# EAGLE board bejing_io_rev_B (EAGLE 5.11)
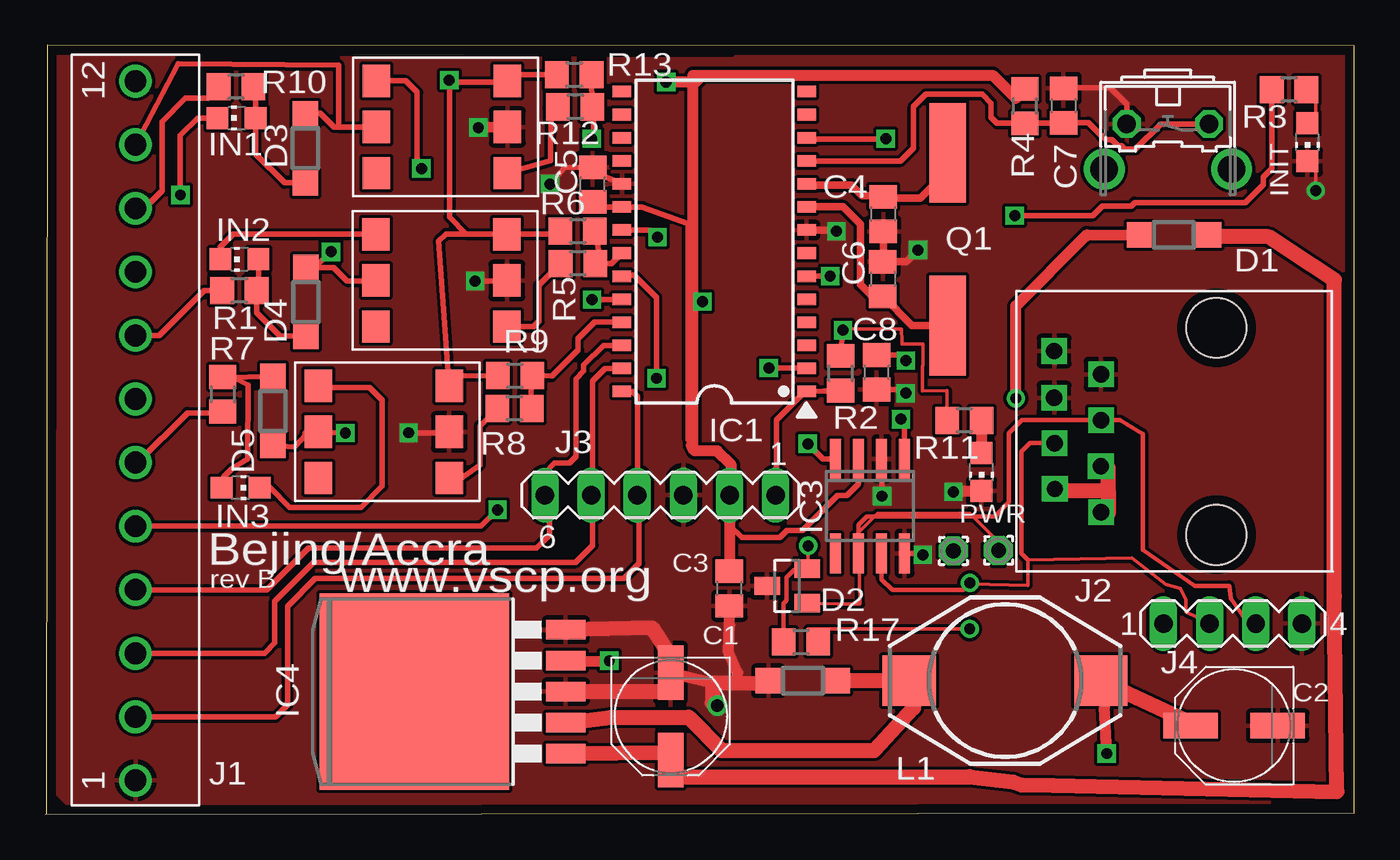
[diagram p0: board, top side]
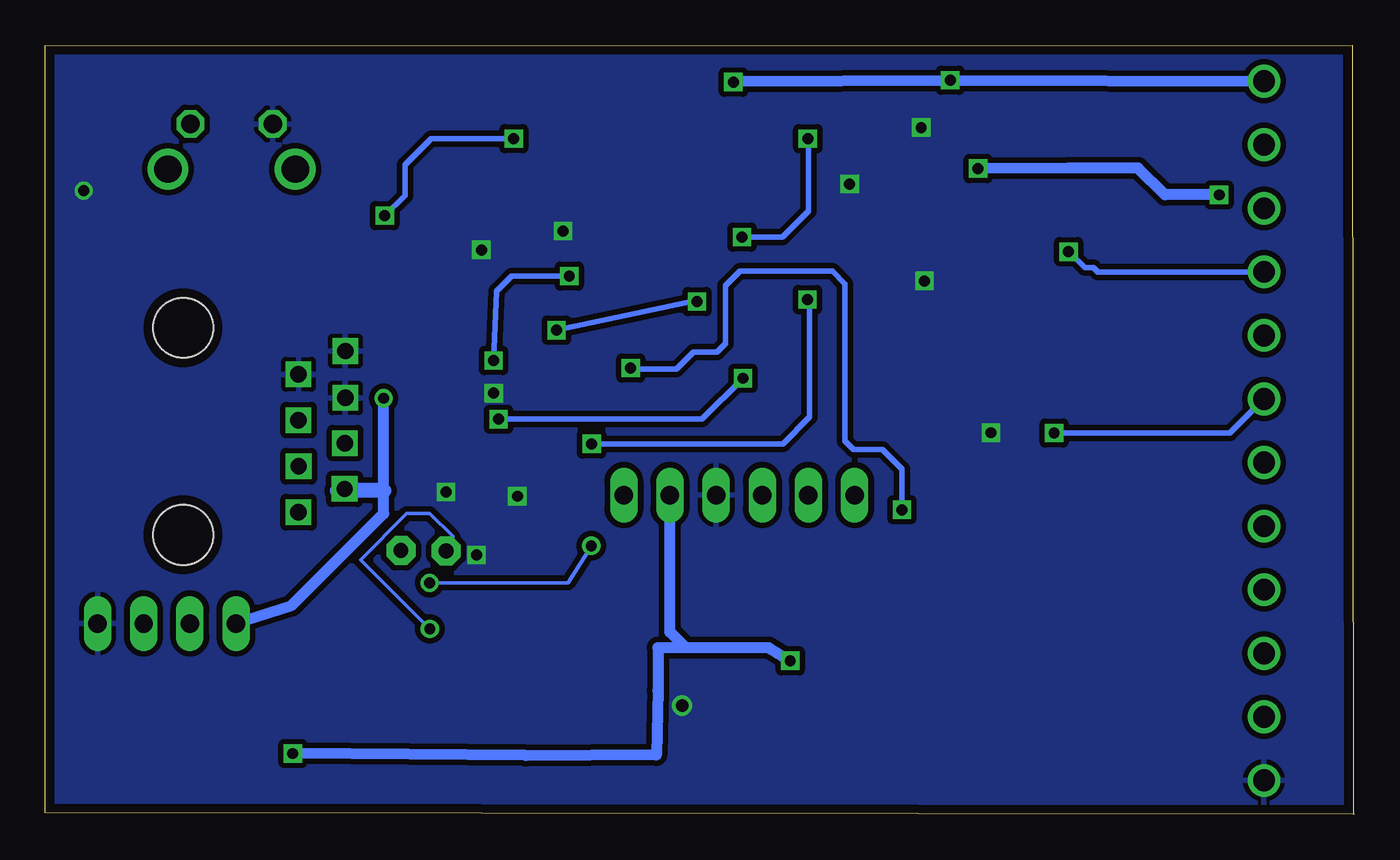
[diagram p1: board, bottom side, seen from below]

Size 72.04 x 42.34 mm. Coordinates in mm from the lower left corner, seen from the top.
Outline: 0,0 72.04,0.09 72.04,42.31 0.09,42.34 0.04,0.01
Copper layers (1*16): Top 0.0356mm / dielectric 1.5011mm / Bottom 0.0356mm
Design rules "SilverCircuits": minimum track width 7mil, minimum drill 14mil, track to track 7mil, track to pad 7mil, pad to pad 7mil, via to via 7mil, smd to smd 0mil, copper to edge 20mil, drill to drill 8mil, minimum pad ring 10mil, minimum via ring 8mil, stop-mask expansion 4mil, vias tented up to drill 0mil, thermal gap 10mil

## Footprints (pad centres in the part's own frame; a part is rotated, then mirrored left to right if it is on the bottom)
SOD123 = smd 1.4 x 1.4: A 1.9,0; C -1.9,0
PANASONIC_D = smd 3 x 1.4: + 2.4,0; - -2.4,0
0805 = smd 1.27 x 1.524: 1 -0.953,0; 2 0.953,0
C0805 = smd 1.3 x 1.5: 1 -0.95,0; 2 0.95,0
SOT23 = smd 1 x 1.4: 1 -0.95,-1.1; 2 0.95,-1.1; 3 0,1.1
SO28 = smd 0.635 x 1.016: 1 -8.255,-5.08; 2 -6.985,-5.08; 3 -5.715,-5.08; 4 -4.445,-5.08; 5 -3.175,-5.08; 6 -1.905,-5.08; 7 -0.635,-5.08; 8 0.635,-5.08; 9 1.905,-5.08; 10 3.175,-5.08; 11 4.445,-5.08; 12 5.715,-5.08; 13 6.985,-5.08; 14 8.255,-5.08; 15 8.255,5.08; 16 6.985,5.08; 17 5.715,5.08; 18 4.445,5.08; 19 3.175,5.08; 20 1.905,5.08; 21 0.635,5.08; 22 -0.635,5.08; 23 -1.905,5.08; 24 -3.175,5.08; 25 -4.445,5.08; 26 -5.715,5.08; 27 -6.985,5.08; 28 -8.255,5.08
H11LX = smd 1.52 x 1.78: 1 0,2.54; 2 0,0; 3 0,-2.54; 4 7.21,-2.54; 5 7.21,0; 6 7.21,2.54
SO-08 = smd 0.6 x 2.2: 1 -1.905,-2.6; 2 -0.635,-2.6; 3 0.635,-2.6; 4 1.905,-2.6; 5 1.905,2.6; 6 0.635,2.6; 7 -0.635,2.6; 8 -1.905,2.6
TO263-5 = smd 1.067 x 2.159: 1 -3.404,-5.791; 2 -1.702,-5.791; 3 0,-5.791; 4 1.702,-5.791; 5 3.404,-5.791 | smd 10.8 x 10.41: 6 0,2.54
PINHEAD-12 = drill 1.2 round: 1 -17.5,0; 2 -14,0; 3 -10.5,0; 4 -7,0; 5 -3.5,0; 6 0,0; 7 3.5,0; 8 7,0; 9 10.5,0; 10 14,0; 11 17.5,0; 12 21,0
RJ-45 = drill 0.9 square: 1 -4.45,6.35; 2 -3.17,8.89; 3 -1.92,6.36; 4 -0.65,8.91; 5 0.62,6.35; 6 1.84,8.93; 7 3.14,6.35; 8 4.42,8.93 | hole 3.3: -5.7,0; 5.7,0
MA06-1 = drill 1.016 long: 1 -6.35,0; 2 -3.81,0; 3 -1.27,0; 4 1.27,0; 5 3.81,0; 6 6.35,0
MA04-1 = drill 1.016 long: 1 -3.81,0; 2 -1.27,0; 3 1.27,0; 4 3.81,0
DO3316P = smd 2.92 x 2.79: 1 -5.28,0; 2 5.28,0
CHIP-LED0805 = smd 1.2 x 1.2: A 0,-1.05; C 0,1.05
1,6/0,8 = drill 0.813 pad 1.6 octagon: 1 0,0
9C = smd 5.5 x 2: P$1 -4.74,0; P$2 4.76,0
R0805 = smd 1.3 x 1.5: 1 -0.95,0; 2 0.95,0
B3F-31XX = drill 1.016 octagon: 1 -2.261,-1.245; 2 2.261,-1.245 | drill 1.499 pad 2.159 round: 3 -3.505,1.245; 4 3.505,1.245

## Placement (x,y rotation side)
1N5819  S1D  [SOD123]  41.69,7.36 180 top
C1  100uF  [PANASONIC_D]  34.42,5.39 270 top
C2  330uF  [PANASONIC_D]  65.44,4.89 180 top
C3  100nF  [0805]  37.65,12.44 90 top
C4  15pF  [C0805]  46.12,33.05 90 top
C5  0.1uF  [C0805]  30.13,34.68 90 top
C6  15pF  [C0805]  46.09,29.48 270 top
C7  0.1uF  [C0805]  56.05,39.02 270 top
C8  1uF  [C0805]  45.76,24.34 90 top
D1  S1D  [SOD123]  62.12,31.91 180 top
D2  NUP2105L  [SOT23]  40.83,12.58 90 top
D3  1N4148  [SOD123]  14.31,36.67 90 top
D4  1N4148  [SOD123]  14.34,28.21 90 top
D5  1N4148  [SOD123]  12.52,22.21 270 top
IC1  PIC18F2580  [SO28]  36.82,31.54 90 top
IC2  H11L1S  [H11LX]  18.19,29.4 0 top
IC3  MCP2551SN  [SO-08]  45.39,16.98 180 top
IC4  LM2575S  [TO263-5]  22.85,6.76 90 top
IC5  H11L1S  [H11LX]  18.22,37.85 0 top
IC6  H11L1S  [H11LX]  15.02,21.06 0 top
J1  OSTTE-12  [PINHEAD-12]  4.96,19.37 90 top
J2  A00-108-220-450  [RJ-45]  64.46,21.09 90 top
J3  [MA06-1]  33.85,17.58 180 top
J4  [MA04-1]  65.36,10.51 0 top
L1  330 uH  [DO3316P]  52.83,7.36 0 top
LED1  green  [CHIP-LED0805]  69.47,37.01 180 top
LED2  [CHIP-LED0805]  10.68,30.57 90 top
LED3  [CHIP-LED0805]  10.75,17.99 270 top
LED8  [CHIP-LED0805]  10.52,38.34 90 top
LED9  red  [CHIP-LED0805]  51.53,18.85 180 top
PAD1  [1,6/0,8]  49.98,14.5 0 top
PAD2  [1,6/0,8]  52.47,14.53 0 top
Q1  10 MHz  [9C]  49.66,31.68 270 top
R1  330  [R0805]  10.68,28.84 180 top
R2  10K  [R0805]  43.78,24.29 90 top
R3  1K  [R0805]  68.46,39.9 180 top
R4  10K  [R0805]  53.92,39 90 top
R5  330  [R0805]  29.31,30.33 180 top
R6  10K  [R0805]  29.3,32.12 0 top
R7  330  [R0805]  9.76,23.13 270 top
R8  330  [R0805]  25.82,22.35 180 top
R9  10K  [R0805]  25.85,24.16 0 top
R10  330  [R0805]  10.49,40.06 180 top
R11  1K  [R0805]  50.59,21.69 180 top
R12  330  [R0805]  29.16,38.95 180 top
R13  10K  [R0805]  29.11,40.73 0 top
R17  120  [R0805]  41.59,9.5 0 top
S1  [B3F-31XX]  61.79,36.77 180 top

## Library data of the parts
1N5819 D1-D5 = diode
C1 C2 C4-C8 R1-R13 R17 = rcl
C3 = cap-master
IC1 = pic_olin
IC2 IC5 IC6 J1 J2 Q1 = vscpcan
IC3 = microchip_can
IC4 = v-reg-3
J3 J4 = con-lstb; OC_FARNELL: unknown; OC_NEWARK: unknown
L1 = inductor-coilcraft; OC_FARNELL: unknown; OC_NEWARK: unknown
LED1-LED3 LED8 LED9 = led
PAD1 PAD2 = wirepad
S1 = switch-omron; MPN: B3F-3100; OC_FARNELL: 959704; OC_NEWARK: 36M3582

## Nets
+12V: D1.A J2.1 J2.2 J2.3 J4.1
CANL: D2.2 IC3.7 J2.4 J4.2 R17.1
CANL1: D2.1 IC3.6 J2.5 J4.3 PAD2.1
GND: 1N5819.A C1.- C2.- C3.1 C4.1 C5.2 C6.1 C7.1 C8.1 D2.3 IC1.8 IC1.19 IC2.5 IC3.2 IC3.8 IC4.3 IC4.5 IC5.5 IC6.5 J1.1 J2.6 J2.7 J2.8 J3.3 J4.4 LED1.C LED9.C S1.2
I1: IC1.21 R12.1 R13.2
I2: IC1.22 R5.1 R6.2
I3: IC1.25 R8.1 R9.2
J6: J1.6 R7.2
J7: D5.A IC6.2 J1.7
J8: J1.8 R1.2
J9: D4.A IC2.2 J1.9
J10: J1.10 R10.2
J11: D3.A IC5.2 J1.11
N$1: 1N5819.C IC4.2 L1.1
N$2: C4.2 IC1.10 Q1.P$1
N$3: C1.+ D1.C IC4.1
N$4: IC1.12 R3.2
N$5: LED1.A R3.1
N$6: C7.2 IC1.11 R4.1 S1.1
N$7: C6.2 IC1.9 Q1.P$2
N$8: IC5.1 LED8.C
N$9: D4.C LED2.A R1.1
N$10: IC2.1 LED2.C
N$11: IC2.4 R5.2
N$12: IC1.1 J3.1 R2.1
N$13: C8.2 IC1.6
N$14: PAD1.1 R17.2
N$16: D5.C LED3.A R7.1
N$17: IC6.1 LED3.C
N$18: IC6.4 R8.2
N$19: D3.C LED8.A R10.1
N$20: LED9.A R11.1
N$23: IC5.4 R12.2
O1: IC1.28 J1.2 J3.4
O2: IC1.27 J1.3 J3.5
O3: IC1.26 J1.4 J3.6
O4: IC1.2 J1.5
RXCAN: IC1.24 IC3.4
TXCAN: IC1.23 IC3.1
VCC: C2.+ C3.2 C5.1 IC1.20 IC2.6 IC3.3 IC4.4 IC5.6 IC6.6 J1.12 J3.2 L1.2 R2.2 R4.2 R6.1 R9.1 R11.2 R13.1
VREF: IC3.5

## Tracks (layer width: path | path; a pad name or v marks a point on that pad's centre or on a via)
+12V  (via drill 0.6)
  Top 0.203: J2.2 55.96,17.83 | 57.23,31.8 57.34,31.91
  Top 0.406: 59.9,31.89 D1.A
  Top 0.61: 55.85,30.45 57.03,31.63 57.34,31.91 59.9,31.89 | 57.23,31.8 53.42,27.99 v53.42,22.91
  Top 0.813: 55.96,17.83 58.5,17.83 | 58.5,17.83 58.5,19.1 J2.3 | 58.5,17.83 58.5,16.56 J2.1
  Bottom 0.61: v53.42,22.91 53.42,17.83 53.42,16.56 58.5,11.48 J4.1
  Bottom 0.813: 53.42,17.83 55.96,17.83 J2.2
CANL  (via drill 0.6)
  Top 0.203: 50.93,12.68 54.08,12.62 54.08,14.02 59.8,14.12 61.68,12.65 62.48,12.45 62.78,11.85 62.78,11.25 62.79,11.15 J4.2 | v41.99,14.79 41.99,13.33 D2.2 | v50.89,12.75 50.93,12.68 | 50.93,12.68 50.88,12.69
  Top 0.254: IC3.7 46.02,12.95 46.62,12.35 50.54,12.35 50.88,12.69 | J2.4 54.18,20.44 53.72,19.98 53.72,14.38 54.08,14.02 | R17.1 40.64,11.61 40.8,11.77 40.8,13.04 41.22,13.46 41.86,13.46 D2.2
  Bottom 0.203: v41.99,14.79 43.26,12.75 v50.89,12.75
CANL1
  Top 0.203: D2.1 43.61,11.58 44.85,11.58 44.77,14.07 IC3.6 44.53,15.29 45.8,16.56 50.88,16.56 52.15,15.29 PAD2.1
  Top 0.254: IC3.6 44.75,15.93 45.23,16.4 52.26,16.4 53.05,17.19 53.05,21.01 53.75,21.71 J2.5 59.15,21.71 60.41,20.95 60.41,14.56 63.28,12.59 65.17,12.59 65.26,11.9 66.11,10.64 J4.3
GND  (via drill 0.6, 0.7)
  Top 0.203: v69.93,34.34 69.93,35.61 LED1.C
  Top 0.254: 36.71,7.23 36.71,7.41
  Top 0.305: IC3.8 48.22,14.38 v48.31,14.29 | v46.06,17.52 46.06,19.55 IC3.2 | S1.2 59.53,39.11 58.63,40.01 56.09,40.01 C7.1 | IC1.19 30.16,35.36 C5.2 28.57,35.6 v27.77,34.71 | v23.65,29.37 25.37,29.37 IC2.5 | v19.99,21.01 21.63,21.01 IC6.5 | 47.1,23.06 47.1,23.12 47.28,23.12 47.28,23.39 C8.1
  Top 0.406: 46.05,32.17 C4.1 46.12,30.46 C6.1 47.39,30.43 v48.04,31.08 | IC1.8 43.18,32.17 v43.55,32.11
  Top 0.61: 34.73,6.77 34.41,6.7 34.7,7.26 34.73,7.23 | 34.73,7.23 34.78,7.18 | 34.73,7.23 C1.- | 39.73,7.35 39.33,7.21 1N5819.A 40.09,7.01 | C1.- 36.71,7.23 | 40.09,7.01 39.47,7.3 | 40.09,7.01 39.55,7.56 | 34.52,7.2 34.42,7.1 | C1.- 34.52,7.2 | 34.55,8.5 34.55,7.23 34.52,7.2 | 36.71,6.14 v36.99,5.99 | 38.1,7.23 38.1,7.79 37.6,8.96 37.66,10.43 C3.1 | LED9.C 50.03,17.8 v49.98,17.75 | IC5.5 v23.83,37.82
  Top 0.813: IC4.3 34.73,6.77 | 39.33,7.21 38.1,7.23 36.71,7.23 36.71,6.14 | IC4.5 33.42,10.26 34.55,8.5
  other vias: 47.36,23.19
  pour Bottom (isolate 0.305): -0.22,1.63 1.44,-1.72 71.42,-2.09 73.46,1.28 73.18,34.45 71.6,43.71 0.21,43.61 -0.71,34.03
  pour Top: 0.64,41.73 0.64,1.16 1.19,0.61 71.2,0.61 71.44,0.85 71.44,41.49 71.68,41.73 38.03,41.73 37.87,41.57
I1  (via drill 0.6)
  Top 0.305: 30.1,38.87 R13.2 | 30.17,38.95 R12.1 30.17,38.89 30.17,37.26 30.07,37.33 v30.07,37.21 | IC1.21 33.31,32.17 v33.7,31.79
  Top 0.61: R12.1 30.1,38.87
  Bottom 0.305: v33.7,31.79 31.46,31.79 30.04,33.21 30.04,37.36 v30.07,37.21
I2
  Top 0.305: R6.2 30.58,30.34 R5.1 31.16,30.33 IC1.22
I3
  Top 0.305: R8.1 26.71,24.09 R9.2 27.88,24.13 29.33,25.58 29.33,26.21 30.21,27.1 IC1.25
J6
  Top 0.305: J1.6 5.08,19.37 7.82,22.11 9.62,22.11 R7.2
J7  (via drill 0.6)
  Top 0.305: D5.A 13.72,20.24 14.38,20.95 14.38,20.78 14.3,20.78 14.3,20.99 IC6.2 v16.5,20.99 v16.51,21
  Bottom 0.305: v16.51,21 6.83,21 J1.7
J8
  Top 0.305: R1.2 8.73,28.84 6.26,26.37 J1.8
J9  (via drill 0.6)
  Top 0.305: 14.83,30.11 D4.A | 14.83,30.11 15.87,30.11 16.61,29.37 18.16,29.37 IC2.2 | v15.72,30.98 14.83,30.11
  Bottom 0.305: J1.9 14.1,29.87 D4.A 14.83,30.11 v15.72,30.98
J10
  Top 0.203: 8.97,39.42 R10.2
  Top 0.305: R10.2 9.49,40.11 | 8.97,39.42 7.7,39.42 6.43,38.15 6.43,34.34 5.16,33.07 J1.10
J11
  Top 0.305: 16.13,37.85 16.13,41.26 7.31,41.34 J1.11 | 16.13,37.85 IC5.2 | 16.13,37.85 15.89,37.85 15.12,38.62 14.36,38.62 D3.A
N$1
  Top 0.61: 47.91,5.91 47.86,5.96 L1.1 47.79,5.86 | IC4.2 28.73,5 28.61,4.94
  Top 0.813: L1.1 1N5819.C | 47.79,5.86 45.64,3.52 37.2,3.52 35.43,5.35 31.1,5.34 28.69,5.05 28.73,5
N$2
  Top 0.406: Q1.P$1 49.66,35.42 48.18,33.94 45.74,33.94 45.6,34.08 | 45.6,34.08 46.04,34.08 C4.2 | 45.6,34.08 44.95,34.08 44.38,34.65 41.96,34.65 IC1.10
N$3
  Top 0.406: 34.43,3.41 C1.+ 34.87,2.08 | D1.C 64.56,31.91 64.66,31.81
  Top 0.813: IC4.1 34.43,3.41 | 64.66,31.81 67.33,31.81 70.96,29.43 70.96,12.02 71.09,1.25 55.47,1.59 53.73,1.62 53.27,1.79 50.87,2.08 34.87,2.08
N$4  (via drill 0.6)
  Top 0.305: IC1.12 42,37.25 42.09,37.17 46.22,37.17 v46.26,37.21 | v53.36,32.97 57.66,32.97 58.18,33.49 59.77,33.49 59.97,33.69 66.06,33.69 67.04,34.67 67.04,35.09 67.51,35.56 R3.2
  Bottom 0.305: v46.26,37.21 50.81,37.21 52.25,35.77 52.25,34.08 v53.36,32.97
N$5
  Top 0.203: 69.93,39.42 69.93,38.15 LED1.A
  Top 0.254: 69.93,39.42 R3.1
N$6
  Top 0.305: IC1.11 41.91,35.97 47.07,35.97 47.79,36.69 47.79,38.97 48.47,39.65 51.57,39.65 52.06,39.16 52.06,38.38 52.39,38.05 R4.1 56.03,38.05 C7.2 56.07,38.09 57.4,38.09 58.15,37.34 58.21,37.34 58.41,37.14 58.7,37.14 59.03,36.81 59.22,36.81 59.41,36.62 60,36.62 61.39,38.02 S1.1
N$7
  Top 0.406: Q1.P$2 47.7,26.92 C6.2 45.49,28.53 44.86,29.16 44.86,32.5 43.91,33.45 IC1.9
N$8  (via drill 0.6)
  Top 0.305: IC5.1 19.84,40.39 20.47,39.76 20.47,35.79 v20.7,35.56 | LED8.C 8.37,38.34 7.42,37.39 v7.42,34.12 v7.43,34.11
  Bottom 0.61: v7.43,34.11 10.41,34.11 11.89,35.59 15.71,35.59 v20.7,35.56
N$9
  Top 0.305: LED2.A 11.73,28.94 R1.1 11.63,27.62 12.91,26.34 14.31,26.34 D4.C
N$10
  Top 0.305: IC2.1 10.33,31.94 9.63,31.24 LED2.C
N$11
  Top 0.305: IC2.4 26.88,26.86 27.17,27.15 27.17,29.14 R5.2
N$12
  Top 0.305: IC1.1 43.73,23.32 R2.1 41.82,23.29 40.24,21.71 40.24,17.62 J3.1
N$13  (via drill 0.6)
  Top 0.305: C8.2 47.21,25.29 v47.37,24.99 | v43.2,29.64 IC1.6
  Bottom 0.305: v47.37,24.99 47.21,28.8 46.38,29.63 v43.21,29.63 v43.2,29.64
N$14  (via drill 0.6)
  Top 0.203: v50.88,10.21 41.99,10.21 R17.2
  Bottom 0.203: v50.88,10.21 54.69,14.02 52.15,16.56 50.88,16.56 49.61,15.29 PAD1.1
N$16
  Top 0.305: D5.C 9.73,24.04 R7.1 10.3,24.08 11.17,23.65 11.13,19.57 10.29,19.05 9.8,18.59 LED3.A
N$17
  Top 0.305: LED3.C 12.36,17.99 13.45,16.9 17.37,16.9 18.54,18.07 18.54,22.81 17.84,23.51 14.46,23.51 IC6.1
N$18
  Top 0.305: IC6.4 22.79,18.45 23.92,19.25 23.92,21.39 R8.2
N$19
  Top 0.305: D3.C 13.16,34.77 11.58,36.35 LED8.A 11.57,39.93 R10.1
N$20
  Top 0.61: R11.1 LED9.A
N$23
  Top 0.305: 25.48,35.34 27.81,36 27.84,38.89
  Top 0.61: IC5.4 25.48,35.34 | 27.84,38.89 R12.2
O1
  Top 0.305: IC1.28 32.32,23.29 32.6,23.01 32.6,17.6 J3.4 32.68,17.48 32.68,13.83 31.84,12.99 14.86,12.99 13.33,11.46 13.33,6.03 12.67,5.37 J1.2
O2
  Top 0.305: IC1.27 30.81,24.55 30.11,23.85 30.11,17.65 J3.5 30.12,17.5 30.12,14.81 29.19,13.88 14.77,13.88 12.63,11.74 12.63,9.44 12.06,8.87 J1.3
O3
  Top 0.305: IC1.26 30.72,25.82 29.63,24.73 29.63,24.4 29.2,23.97 29.2,19.7 28.85,19.35 28.04,19.35 27.5,18.81 J3.6 27.74,17.34 27.74,15.37 27.04,14.67 14.49,14.67 12.19,12.37 J1.4
O4  (via drill 0.6)
  Top 0.305: J1.5 23.99,15.87 v24.89,16.77 | v39.82,24.58 41.88,24.58 IC1.2
  Bottom 0.305: v24.89,16.77 24.89,19.02 25.96,20.09 27.55,20.09 28.02,20.56 28.02,29.2 28.72,29.9 33.8,29.9 34.59,29.11 34.59,25.93 35.06,25.46 36.37,25.46 37.3,24.53 39.77,24.53 v39.82,24.58
RXCAN  (via drill 0.6)
  Top 0.305: IC3.4 42.79,19.58 v41.97,20.4 | v30.09,28.35 31.72,28.35 IC1.24
  Bottom 0.305: v41.97,20.4 31.45,20.4 29.98,21.87 29.98,28.24 v30.09,28.35
TXCAN  (via drill 0.6)
  Top 0.305: IC3.1 47.3,21.55 v47.09,21.76 | v33.64,24.01 33.64,28.46 32.4,29.7 31.8,29.7 IC1.23
  Bottom 0.305: v47.09,21.76 35.89,21.76 v33.64,24.01
VCC  (via drill 0.6)
  Top 0.203: R11.2 49.61,21.64 49.63,22.69 49.63,23.33 48.29,23.32 48.29,24.68 48.3,24.72 48.3,25.89 47.14,25.89 47.14,26.06 47.12,26.72 44.53,26.72 43.87,26.77
  Top 0.254: 35.56,20.32 35.64,20.37
  Top 0.305: 35.38,28.13 35.38,20.63 35.56,20.32 | 35.38,28.13 35.38,32.53 32.84,33.45 IC1.20 30.84,33.45 C5.1 | J3.2 37.76,17.68 | 30.94,8.41 v31.04,8.46 | IC3.3 44.75,18.2 44.11,17.55 43.59,17.55 41.67,15.63 40.82,15.63 40.43,15.24 38.34,15.24 37.66,15.92 | 58.3,5.92 L1.2 | R2.2 43.87,26.77 43.86,26.86 v43.9,26.66 | v36.17,28.24 35.49,28.24 35.38,28.13 | R13.1 25.77,40.73 IC5.6 | R6.1 28.17,31.94 IC2.6 23.19,31.94 23.17,31.96 | 23.17,31.96 22.24,32.89 v22.24,40.41 v22.23,40.42 22.33,40.32 25.12,40.32 | R9.1 22.25,24.13 IC6.6 21.65,31.56 22.05,31.96 23.17,31.96
  Top 0.406: 63.13,5 C2.+
  Top 0.61: 35.56,20.32 35.74,20.01 36.98,20.01 37.76,19.23 37.76,17.68 | IC4.4 30.94,8.41 | C3.2 37.67,13.99 37.66,14.1 37.66,15.92 J3.2 | v58.42,3.35 58.3,5.92 | 36.16,40.69 35.64,40.69 35.64,20.37 | 36.16,40.69 52.15,40.69 53.42,39.42 R4.2 | v34.17,40.32 35.79,40.32 36.16,40.69 | 25.39,40.63 25.43,40.32 25.12,40.32 IC5.6
  Top 0.813: L1.2 63.13,5
  Bottom 0.305: v43.9,26.66 36.22,28.29 v36.17,28.24
  Bottom 0.61: J3.2 37.66,10.04 36.79,9.17 | 36.79,9.17 32.22,9.17 v31.04,8.46 | v58.42,3.35 45.6,3.24 45.6,3.23 38.41,3.27 38.33,6.82 38.33,9.17 36.79,9.17 | v34.17,40.32 34.12,40.37 v22.23,40.42 J1.12

## Text on the board
tNames: IN1 | INIT | IN2 | IN3 | PWR | Bejing/Accra | rev B | www.vscp.org